# Altium PCB HeliPCB.PcbDoc
Units mil, origin at the board's own origin, x right, y up, seen from the top; angles counter-clockwise.
Board outline 968 x 1148 mil, 2 copper layers (Top Layer, Bottom Layer); 18 components, 23 nets, 108 pads, 12 vias.
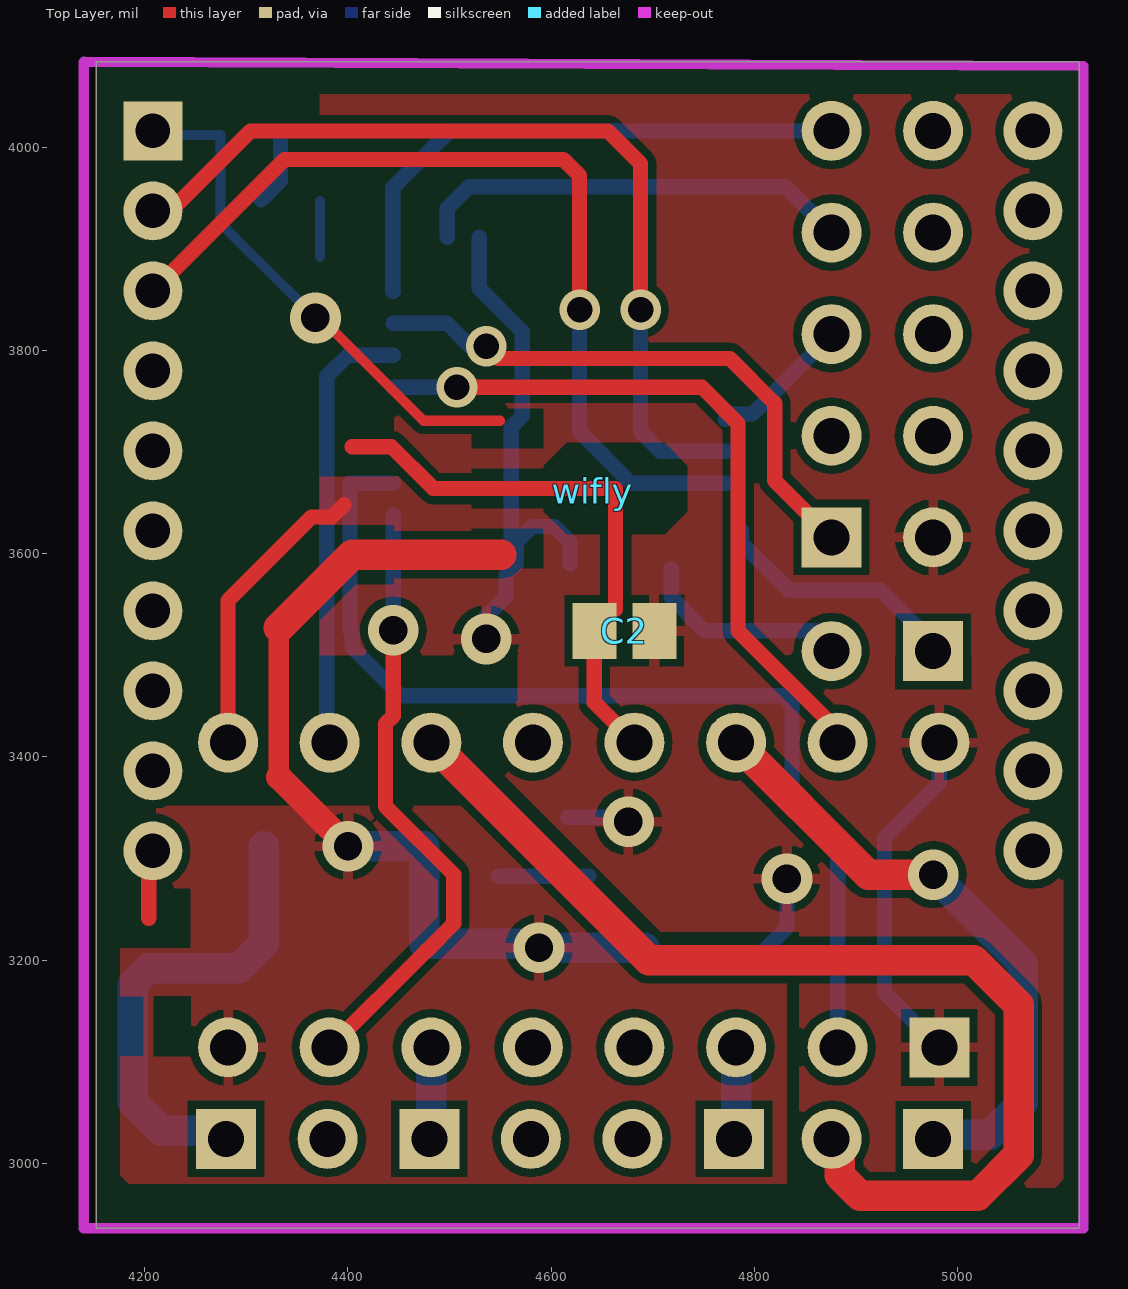
[diagram p0: Top Layer view]
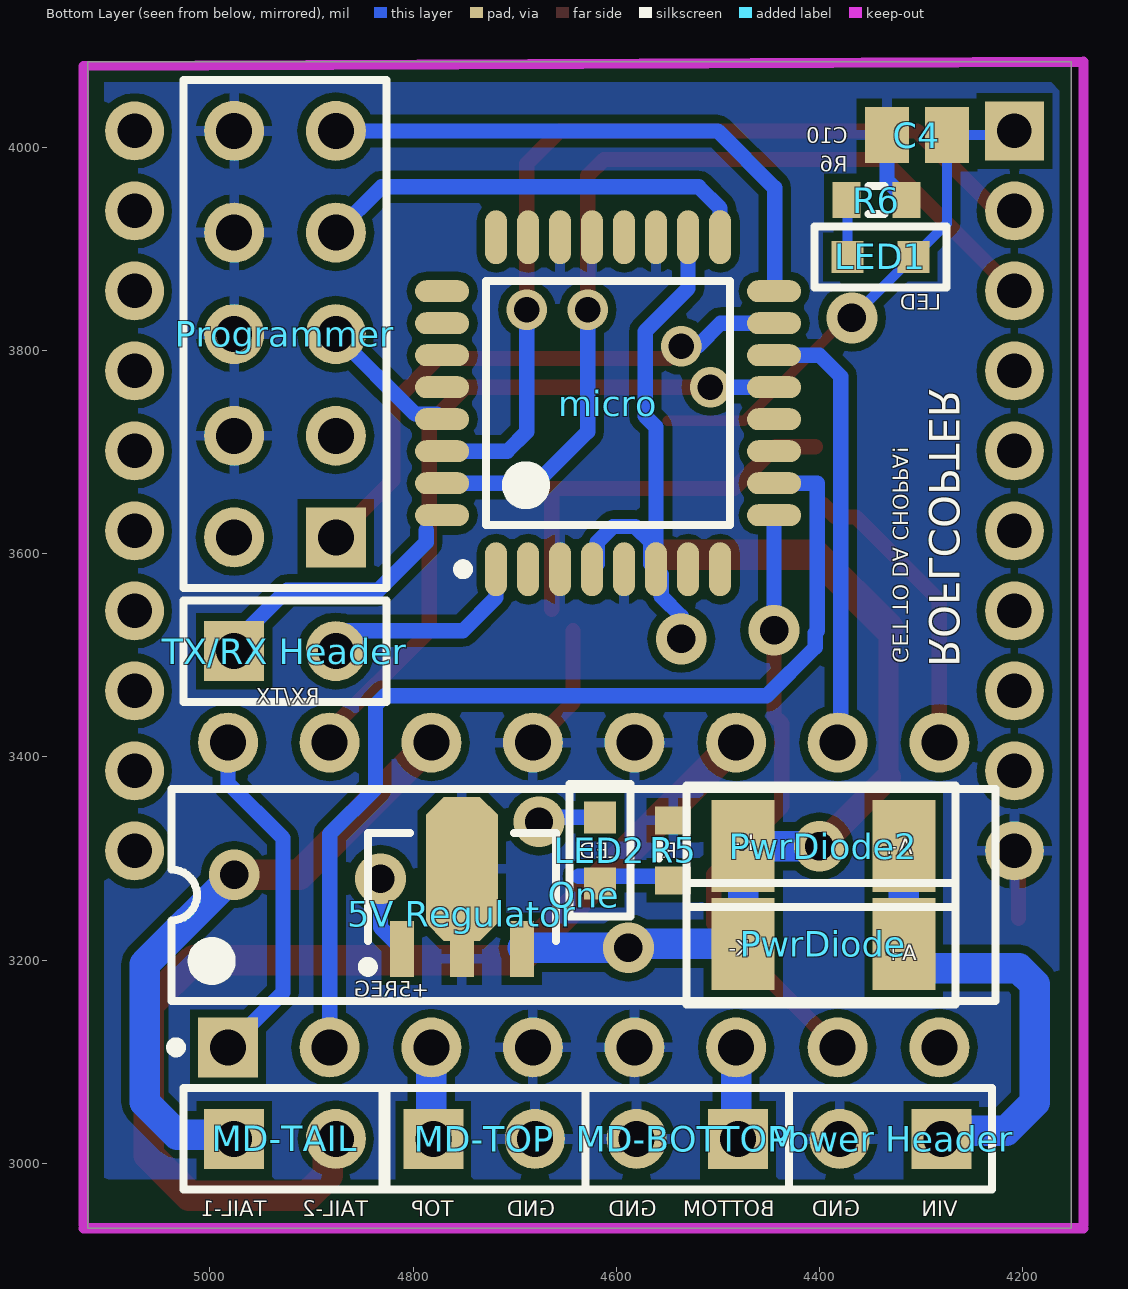
[diagram p1: Bottom Layer view, seen from below]

## Layer stack, top to bottom
Top Layer: signal copper 1.4
Dielectric: dielectric 12.6, FR-4, Dk 4.8
Bottom Layer: signal copper 1.4

## Board outline
5120,4084 5120,2936 4152,2936 4152,4084 5116,4084

## Design rules (kind name [scope] priority, off if disabled: settings)
AssemblyTestPointUsage AssemblyTestPointUsage_1 [All] p2:
AssemblyTestpoint AssemblyTestpoint_1 [All] p2: testpointundercomponent=TRUE minsize=40 maxsize=100 preferedsize=60 minholesize=0 maxholesize=40 preferedholesize=32 testpointgrid=1 usegrid=TRUE gridtolerance=0.01 allowsidetop=TRUE allowsidebottom=TRUE
Clearance Clearance-default [All] p1: gap=8
Clearance Clearance-HIGHV [(InNet('+6V') OR  InNet('VIN') OR  InNet('MD-TOP') OR  InNet('MD-BOTTOM') OR  InNet('MD-TAIL-1') OR  InNet('MD-TAIL-2')) vs InNet('GND')] p2: gap=10
ComponentClearance [All] p1 off: gap=10 collisioncheckmode=3 verticalgap=10 showdistances=FALSE
ComponentClearance ComponentClearance_1 [All] p2 off: gap=10 collisioncheckmode=3 verticalgap=10 showdistances=FALSE
DiffPairsRouting DiffPairsRouting_1 [All] p2: maxlimit=10 minlimit=10 mostfreqgap=10 maxuncoupledlength=500
FabricationTestPointUsage TestPointUsage [All] p2: valid=0 allowmultiple=FALSE
FabricationTestpoint Testpoint [All] p2: side=3 testpointundercomponent=TRUE minsize=40 maxsize=100 preferedsize=60 minholesize=0 maxholesize=40 preferedholesize=32 testpointgrid=1 allowsidetop=TRUE allowsidebottom=TRUE usegrid=TRUE gridtolerance=0.01
FanoutControl Fanout_LCC [IsLCC] p1: bgadir=Out bgaviamode=Centered fanoutstyle=Auto fanoutdirection=Alternating viagrid=1 // Fanout_LCC (Default Rule)
FanoutControl Fanout_BGA [IsBGA] p2: bgadir=Out bgaviamode=Centered fanoutstyle=Auto fanoutdirection=Alternating viagrid=1 // Fanout_BGA (Default Rule)
FanoutControl Fanout_Small [(CompPinCount < 5)] p3: bgadir=Out bgaviamode=Centered fanoutstyle=Auto fanoutdirection=OutThenIn viagrid=1 // Fanout_Small (Default Rule)
FanoutControl Fanout_SOIC [IsSOIC] p4: bgadir=Out bgaviamode=Centered fanoutstyle=Auto fanoutdirection=Alternating viagrid=1 // Fanout_SOIC (Default Rule)
FanoutControl Fanout_BGA_1 [IsBGA] p6: bgadir=Out bgaviamode=Centered fanoutstyle=Auto fanoutdirection=Alternating viagrid=1 // Fanout_BGA (Default Rule)
FanoutControl Fanout_LCC_1 [IsLCC] p7: bgadir=Out bgaviamode=Centered fanoutstyle=Auto fanoutdirection=Alternating viagrid=1 // Fanout_LCC (Default Rule)
FanoutControl Fanout_SOIC_1 [IsSOIC] p8: bgadir=Out bgaviamode=Centered fanoutstyle=Auto fanoutdirection=Alternating viagrid=1 // Fanout_SOIC (Default Rule)
FanoutControl Fanout_Small_1 [(CompPinCount < 5)] p9: bgadir=Out bgaviamode=Centered fanoutstyle=Auto fanoutdirection=OutThenIn viagrid=1 // Fanout_Small (Default Rule)
FanoutControl Fanout_Default_1 [All] p10: bgadir=Out bgaviamode=Centered fanoutstyle=Auto fanoutdirection=Alternating viagrid=1 // Fanout_Default (Default Rule)
Height Height_1 [All] p2: minheight=0 maxheight=1000 prefheight=500
HoleSize HoleSize_1 [All] p2: absolutevalues=TRUE maxlimit=100 minlimit=1 maxpercent=80.000 minpercent=20.000
HoleToHoleClearance HoleToHoleClearance_1 [All] p2: gap=10 allowstackedmicrovias=TRUE
LayerPairs LayerPairs_1 [All] p2: enforce=TRUE
MinimumSolderMaskSliver MinimumSolderMaskSliver_1 [All] p2: minsoldermaskwidth=10
NetAntennae NetAntennae_1 [All] p2: netantennaetolerance=0
PasteMaskExpansion PasteMaskExpansion_1 [All] p2: expansion=0
PlaneClearance PlaneClearance_1 [All] p2: clearance=20
PolygonConnect [All] p1: connectstyle=Relief reliefconductorwidth=10 reliefentries=4 polygonreliefangle="90 Angle"
PolygonConnect PolygonConnect_1 [All] p2: connectstyle=Relief reliefconductorwidth=10 reliefentries=4 polygonreliefangle="90 Angle"
RoutingPriority RoutingPriority_1 [(InNet('+6V') OR InNet('+3.3V') OR InNet('+5V') OR InNet('GND') OR InNet('VIN'))] p2: routingpriority=100
RoutingTopology RoutingTopology_1 [All] p2: topology=Shortest
RoutingVias [All] p1: holewidth=25 width=40 viastyle="Through Hole" minholewidth=28 minwidth=50 maxholewidth=28 maxwidth=50
ShortCircuit ShortCircuit_1 [All] p2: allowed=FALSE
SilkToSilkClearance SilkToSilkClearance_1 [All] p2: silktosilkclearance=10
SilkscreenOverComponentPads [All] p1: minsilkscreentomaskgap=10
SilkscreenOverComponentPads SilkscreenOverComponentPads_1 [All] p2: minsilkscreentomaskgap=10
SolderMaskExpansion [All] p1: expansion=4
SolderMaskExpansion SolderMaskExpansion_1 [All] p2: expansion=4
UnRoutedNet UnRoutedNet_1 [All] p2:
Width Width-motor-drive-gnd [(InNet('GND') AND InComponent('One'))] p1: maxlimit=40 minlimit=30 preferedwidth=30
Width Width-motor-drive [(InNet('MD-BOTTOM') OR InNet('MD-TAIL-1') OR InNet('MD-TAIL-2') OR InNet('MD-TOP') OR InNet('+6V') OR InNet('VIN'))] p2: maxlimit=40 minlimit=20 preferedwidth=30
Width Width-Default [All] p3: maxlimit=35 minlimit=10 preferedwidth=15
22 further rules are at their usual default settings.

## Components (designator, comment, footprint, x,y, rotation, side; value= is the part's Value field where it differs from the comment)
"5V Regulator" "5v Regulator" SOT89-150P360X170-3N 4752,3272 r90 bottom
C2 "Cap" C0805 4672,3524 r0 top
C4 "Cap" C0805 4304,4012 r180 bottom
LED1 "LED" LEDFixed 4340,3892 r0 bottom
LED2 "LED" LEDFixed 4616,3308 r270 bottom
MD-BOTTOM "Header 2" HDR1X2 4480,3024 r0 bottom
MD-TAIL "Header 2" HDR1X2 4976,3024 r180 bottom
MD-TOP "Header 2" HDR1X2 4780,3024 r180 bottom
micro "ATmega328-AU" 32A_L 4608,3748 r90 bottom
One "SN754410" DIP-16 4632,3264 r90 bottom
"Power Header" "Header 2" HDR1X2 4280,3024 r0 bottom
Programmer "Header 5X2" HDR2X5 4876,3616 r90 bottom
PwrDiode "DIODE" Diode 4396,3216 r0 bottom
PwrDiode2 "DIODE" Diode 4396,3312 r0 bottom
R5 "Res3" J1-0603 4544,3308 r90 bottom
R6 "Res3" J1-0603 4344,3948 r180 bottom
"TX/RX Header" "Header 2" HDR1X2 4976,3504 r180 bottom
wifly "RN-XV" XBEE 4208,4016 r270 top

## Footprints (in the part's own frame and the unit in brackets; to place one, negate y for a bottom-side part, rotate by r counter-clockwise, add the part's x,y. Pads: shape width x height; smd on the part's side, far side on the other; paste and mask are expansions set on the pad)
32A_L [mm] "32-Pin Thin Quad Flat Pack 0.8 mm Pitch, IPC High Density"
  oval 1.35x0.55 smd: 1(-4.15,2.8) 2(-4.15,2) 3(-4.15,1.2) 4(-4.15,0.4) 5(-4.15,-0.4) 6(-4.15,-1.2) 7(-4.15,-2) 8(-4.15,-2.8) 17(4.15,-2.8) 18(4.15,-2) 19(4.15,-1.2) 20(4.15,-0.4) 21(4.15,0.4) 22(4.15,1.2) 23(4.15,2) 24(4.15,2.8)
  oval 0.55x1.35 smd: 9(-2.8,-4.15) 10(-2,-4.15) 11(-1.2,-4.15) 12(-0.4,-4.15) 13(0.4,-4.15) 14(1.2,-4.15) 15(2,-4.15) 16(2.8,-4.15) 25(2.8,4.15) 26(2,4.15) 27(1.2,4.15) 28(0.4,4.15) 29(-0.4,4.15) 30(-1.2,4.15) 31(-2,4.15) 32(-2.8,4.15)
  silkscreen extent -4.27,-3.05 3.05,3.75, body extent -3.5,-3.5 3.5,3.5, height 1.2
C0805 [mm] "Chip Capacitor, Body 2.0x1.3mm, IPC High Density"
  rect 1.1x1.4 smd: 1(-0.75,0) 2(0.75,0)
  body extent -1.1,-0.72 1.1,0.72, height 1.4
Diode [mm]
  rect 1.57x2.3 smd: A(-2.01,0) K(2.01,0)
  silkscreen extent -3.3,-1.52 3.43,1.52
DIP-16 [mm] "DIP; 16 Leads; Row Spacing 7.62 mm; Pitch 2.54 mm"
  rect 1.5x1.5 hole 0.9: 1(-3.81,8.89)
  round 1.5 hole 0.9: 2(-3.81,6.35) 3(-3.81,3.81) 4(-3.81,1.27) 5(-3.81,-1.27) 6(-3.81,-3.81) 7(-3.81,-6.35) 8(-3.81,-8.89) 9(3.81,-8.89) 10(3.81,-6.35) 11(3.81,-3.81) 12(3.81,-1.27) 13(3.81,1.27) 14(3.81,3.81) 15(3.81,6.35) 16(3.81,8.89)
  silkscreen extent -3.93,-10.3 2.65,10.32, body extent -3.6,-10.28 3.6,10.28, height 5.08
HDR1X2 [mm] "Connector; Header; 2 Position"
  rect 1.5x1.5 hole 0.9: 1(0,0)
  round 1.5 hole 0.9: 2(2.54,0)
  silkscreen extent -1.27,-1.27 3.81,1.27
HDR2X5 [mm] "Connector; Header; 5x2 Position"
  rect 1.5x1.5 hole 0.9: 1(0,0)
  round 1.5 hole 0.9: 2(0,2.54) 3(2.54,0) 4(2.54,2.54) 5(5.08,0) 6(5.08,2.54) 7(7.62,0) 8(7.62,2.54) 9(10.16,0) 10(10.16,2.54)
  silkscreen extent -1.27,-1.27 11.43,3.81
J1-0603 [mm] "Chip Resistor, Body 1.6x0.8mm, IPC High Density"
  rect 0.7x0.9 smd: 1(-0.75,0) 2(0.75,0)
  silkscreen extent -0.2,-0.35 0.2,0.35, body extent -0.85,-0.48 0.85,0.48, height 0.9
LEDFixed [mm]
  rect 0.8x0.8 smd: A(-0.825,0) K(0.825,0)
  silkscreen extent -1.65,-0.76 1.65,0.76
SOT89-150P360X170-3N [mm] "SOT89, 3-Leads, Body 4.5x2.5mm (max), Pitch 1.50mm, Lead Span 3.6mm, IPC Medium Density"
  rect 1.4x0.6 smd: 1(-1.55,1.5) 3(-1.55,-1.5)
  rect 0.9x0.6 smd: 2(-1.8,0)
  oct 3.6x1.8 smd: 2(0.45,0)
  silkscreen extent -2.12,-2.35 1.35,2.48, body extent -1.35,-2.35 1.35,2.35, height 1.7
XBEE [mil]
  rect 58x58 hole 34: 1(0,0)
  round 58 hole 34: 2(78.73,0) 3(157.47,0) 4(236.2,0) 5(314.93,0) 6(393.67,0) 7(472.4,0) 8(551.13,0) 9(629.87,0) 10(708.6,0) 11(708.6,866.07) 12(629.87,866.07) 13(551.13,866.07) 14(472.4,866.07) 15(393.67,866.07) 16(314.93,866.07) 17(236.2,866.07) 18(157.47,866.07) 19(78.73,866.07) 20(0,866.07)

## Part data
C2 C4: "Capacitor"
MD-BOTTOM MD-TAIL MD-TOP "Power Header" "TX/RX Header": "Header, 2-Pin"
micro: "8-bit AVR Microcontroller, 32KB Flash, 1KB EEPROM, 2KB SRAM, 32-pin TQFP, Industrial Grade (-40°C to 85°C)"
Programmer: "Header, 5-Pin, Dual row"
R5 R6: "Resistor"

## Via types
v1: diameter 50, hole 28, Top Layer to Bottom Layer, 8 vias
v2: diameter 40, hole 25, Top Layer to Bottom Layer, 4 vias

## Nets (pads, with @x,y where several pads share a name; then routed paths per layer and width w, separated by ;. In a path a pad name is that pad's centre, name@x,y a point inside that pad or via, vN(x,y) a via of type N, cw(c..) or ccw(c..) an arc to the next point about the centre after c; other vN are vias at no path point)
+3.3V: C4.2 LED1.A wifly.1 | length 504.9
  Top Layer w10: v1(4368,3832) 4373,3832 4474.25,3730.75 4549.44,3730.75
  Bottom Layer w10: wifly.1@4212,4012 C4.2 4274.47,3925.05 LED1.A 4308,3892 v1(4368,3832)
+5V: "5V Regulator.1" C2.2 LED2.A micro.4 micro.6 micro.18 One.1 One.9 One.16 Programmer.2 | length 1306.8
  Top Layer w15: One.9 4282,3553.89 4364.12,3636 4384,3636 4396,3648
  Bottom Layer w15: micro.18 4529.26,3860.94 4571.5,3818.7 4571.5,3735.55 4560.76,3724.81 micro.6 4565.93,3589.78 4565.93,3611.27 4581.35,3626.69 4603.16,3626.69 4618.58,3611.27 micro.4@4618.58,3589.78 ; v1(4536,3516) 4536,3538.37 4555.59,3557.96 micro.6@4555.59,3579.44 ; LED2.A v1@4671.52,3340.48 ; 4811.06,3210.98 4832,3231.92 v1(4832,3280) ; One.1 4928,3168 4928,3320 4982,3374 One.16
  other v1: 4676,3336
+6V: "5V Regulator.3" One.8 PwrDiode2.K PwrDiode.K | length 875.8
  Top Layer w20: 4332,3380 4332,3526.85
  Top Layer w25: 4332,3380 v1(4400,3312)
  Top Layer w30: 4332,3526.85 4404,3598.85 4551.04,3598.85
  Bottom Layer w30: v1(4400,3312) PwrDiode2.K PwrDiode.K v1@4584,3216 ; v1(4588,3212) 4691.92,3212
GND: "5V Regulator.2" "Power Header.2" C2.1 C4.1 MD-BOTTOM.2 MD-TOP.2 micro.3 micro.5 micro.19 micro.21 micro.22 One.4 One.5 One.12 One.13 Programmer.4 Programmer.6 Programmer.8 Programmer.10 R5.2 R6.2 wifly.10 | length 656
  Top Layer w15: 4204,3241.15 wifly.10@4204,3303.4 ; 4404,3705.15 4442.85,3705.15 4484,3664 4565.01,3664 4663.43,3664 C2.1@4663.43,3544.96 ; C2.1 4642.47,3453.53 One.13
  Bottom Layer w15: R6.2 4333.53,3967.06 C4.1
MC-BOTTOM: micro.9 One.7 | length 605.4
  Top Layer w15: One.7 4477.07,3209.07 4477.29,3209.07 4504.08,3235.86 4504.08,3284.14 4436.97,3351.25 4436.97,3432.65 4444.61,3440.29 v1(4444.61,3524.61)
  Bottom Layer w15: v1(4444.61,3524.61) micro.9
MC-TAIL-1: micro.13 One.15 | length 702.4
  Top Layer w15: v2(4507.25,3763.75) 4748.25,3763.75 4784,3728 4784,3524 One.15@4886,3422
  Bottom Layer w15: micro.13 v2(4507.25,3763.75)
MC-TAIL-2: micro.14 One.10 | length 429.6
  Bottom Layer w15: One.10@4379,3419 4379,3524 4379,3774.24 4400,3795.24 micro.14
MC-TOP: micro.10 One.2 | length 1017
  Bottom Layer w15: micro.10 4402,3669.26 4402,3524 4404.11,3521.89 4404.11,3507.84 4451.95,3460 4828,3460 4836.97,3451.03 4836.97,3368.97 4882,3323.94 One.2
MD-BOTTOM: MD-BOTTOM.1 One.6 | length 88
  Bottom Layer w30: MD-BOTTOM.1@4482,3026 One.6
MD-TAIL-1: MD-TAIL.1 One.14 | length 601.6
  Top Layer w30: One.14 4912,3284 v1(4976,3284)
  Bottom Layer w30: v1(4976,3284) 5064,3196 5064,3060 5032,3028 MD-TAIL.1@4984,3028
MD-TAIL-2: MD-TAIL.2 One.11 | length 1073.7
  Top Layer w30: One.11 4696,3200 5016,3200 5060,3156 5060,3008 5020,2968 4904,2968 4884,2988 MD-TAIL.2@4884,3028
MD-TOP: MD-TOP.1 One.3 | length 88
  Bottom Layer w30: MD-TOP.1@4782,3026 One.3
MISO: micro.16 Programmer.9 | length 557.6
  Bottom Layer w15: micro.16 4444,3858.24 4444,3960 4500,4016 Programmer.9
MOSI: micro.15 Programmer.1 | length 551.2
  Top Layer w15: v2(4536,3804) 4548,3792 4776,3792 4820,3748 4820,3672 Programmer.1
  Bottom Layer w15: micro.15 4497.26,3826.74 4520,3804 v2@4524,3804
NetLED1_K: LED1.K R6.1 | length 55
  Bottom Layer w10: LED1.K R6.1@4372.48,3946.95
NetLED2_K: LED2.K R5.1 | length 89
  Bottom Layer w15: R5.1@4548,3282.47 4637.05,3282.47
RESET: micro.29 Programmer.5 | length 139.7
  Bottom Layer w15: micro.29 4776.56,3737.42 4798.04,3737.42 4876,3815.38 Programmer.5
RX: "TX/RX Header.2" micro.1 | length 199.2
  Bottom Layer w15: micro.1 4718.24,3556.76 4751,3524 4876,3524
RX_ATM: micro.30 wifly.2 | length 881.2
  Top Layer w15: wifly.2 4225.27,3937.27 4304,4016 4656,4016 4688,3984 v2(4688,3840)
  Bottom Layer w15: v2(4688,3840) 4688,3720 4707.24,3700.76 micro.30
SCK: micro.17 Programmer.7 | length 434.2
  Bottom Layer w15: micro.17 4497.76,3940 4518.76,3961 4831,3961 Programmer.7
TX: "TX/RX Header.1" micro.32 | length 250
  Bottom Layer w15: 4787,3623 4787,3611 4834,3564 4924,3564 4976,3512 4976,3504
TX_ATM: micro.31 wifly.3 | length 896.7
  Top Layer w15: wifly.3 4337.47,3988 4612,3988 4628,3972 v2(4628,3840)
  Bottom Layer w15: v2(4628,3840) 4628,3720 4678.74,3669.26 micro.31
VIN: "Power Header.1" PwrDiode2.A PwrDiode.A | length 465
  Bottom Layer w30: 4284,3032 4216,3032 4188,3060 4188,3176 4204,3192 4292.87,3192 PwrDiode.A PwrDiode2.A
pads on no net: micro.2 micro.7 micro.8 micro.11 micro.12 micro.20 micro.23 micro.24 micro.25 micro.26 micro.27 micro.28 Programmer.3 wifly.4 wifly.5 wifly.6 wifly.7 wifly.8 wifly.9 wifly.11 wifly.12 wifly.13 wifly.14 wifly.15 wifly.16 wifly.17 wifly.18 wifly.19 wifly.20

## Polygon pours and split planes (outlines as drawn)
GND on Bottom Layer "Top Layer-No Net" (solid, remove dead copper, pour order 52): 4176,4064 5104,4064 5104,2980 5100,2984.11 4164,2984.11 4164,4055.79 4172,4064
+6V on Top Layer "Top Layer-No Net" (solid, remove dead copper, pour order 60): 4176,2988 4184,2980 4832,2980 4832,3364 4836,3368 4820,3352 4176,3352 4176,2984
+5V on Top Layer "Top Layer-No Net" (solid, remove dead copper, pour order 54): 4372,4052 5104,4052 5104,3506.23 5100.86,3504.15 5094.58,3500 4372,3500 4372,4049.92
+5V on Top Layer "Top Layer-No Net" (solid, remove dead copper, pour order 5): 5104,2984 5096,2976 4844,2976 4844,3560 4848,3564 5104,3564 5104,2984
+5V on Top Layer "Top Layer-No Net" (solid, remove dead copper, pour order 7): 4580,3504 4588,3512 4880,3512 4880,3228 4884,3224 4880,3228 4720,3228 4708,3228 4524,3412 4567.01,3455.01 4567.01,3504.62

## Keep-outs
Keep-Out Layer:
  lines w10: 4140,2936 5124,2936 ; 4140,2940 4140,4084 ; 4140.05,4084.05 5124,4080 5124,2940

## Silkscreen, mask and mechanical layers (free items; w line width, h text height)
Bottom Overlay:
  text "C10" at 4372,4004 h15
  text "R6" at 4372,3976 h15
  text "LED" at 4280,3840 h15
  text "GET TO DA CHOPPA!" at 4328,3492 h15 r90
  text "ROFLCOPTER" at 4292,3488 h30 r90
  text "RX/TX" at 4892,3452 h15
  text "K-" at 4464,3308 h15
  text "A+" at 4308,3304 h15
  text "R" at 4540,3300 h15
  text "LED" at 4596,3300 h15
  text "K-" at 4468,3204 h15
  text "A+" at 4304,3200 h15
  text "+5REG" at 4784,3164 h15
  text "VIN" at 4264,2948 h15
  text "GND" at 4360,2948 h15
  text "BOTTOM" at 4444,2948 h15
  text "GND" at 4560,2948 h15
  text "GND" at 4660,2948 h15
  text "TOP" at 4760,2948 h15
  text "TAIL-2" at 4844,2948 h15
  text "TAIL-1" at 4944,2948 h15
Mechanical 16:
  drawing of 1872 lines, arcs and shapes, not listed
  text "1" at 1172.34,7365 h70
  text "2" at 3530.35,7365 h70
  text "3" at 5907,7365 h70
  text "4" at 8282.35,7365 h70
  text "A" at 75,6475 h70
  text "A" at 9370,6475 h70
  text "B" at 75,4599 h70
  text "B" at 9370,4599 h70
  text "C" at 3890,4443 h70
  text "ENGINEER:" at 5878,4172 h45
  text "REV:" at 3886,4108 h45
  text "D" at 2184,3572 h70
  text "TITLE:" at 870,3020 h45
  text "C" at 75,2723 h70
  text "PCB DESIGNER:" at 5710,1409 h45
  text "PART NO.:" at 4098,1396 h45
  text "D" at 75,851 h70
  text "DATE:" at 4850,700 h45
  text "Altium Limited" at 3550,600 h70
  text ".PRINT_DATE" at 4900,580 h70
  text "12a Rodborough Rd" at 3550,500 h70
  text "Frenchs Forest" at 3550,400 h70
  text "FILE NAME:" at 4850,400 h45
  text "DWG NO:" at 6350,400 h45
  text "SCALE:" at 8450,400 h45
  text "NSW 2086" at 3550,300 h70
  text ".PCB_FILE_NAME_NO_PATH" at 4900,280 h70
  text "1" at 1172.34,65 h70
  text "2" at 3530.35,65 h70
  text "3" at 5907,65 h70
  text "4" at 8282.35,65 h70